# Altium PCB Simple ballast for fluorescent lamps T8.PcbDoc
Units mm, origin at the board's own origin, x right, y up, seen from the top; angles counter-clockwise.
Board outline 116.1 x 42.1 mm, 2 copper layers (Top Layer, Top, Bottom Layer, Bottom), stack 1.571 mm thick; 44 components, 31 nets, 115 pads, 0 vias.
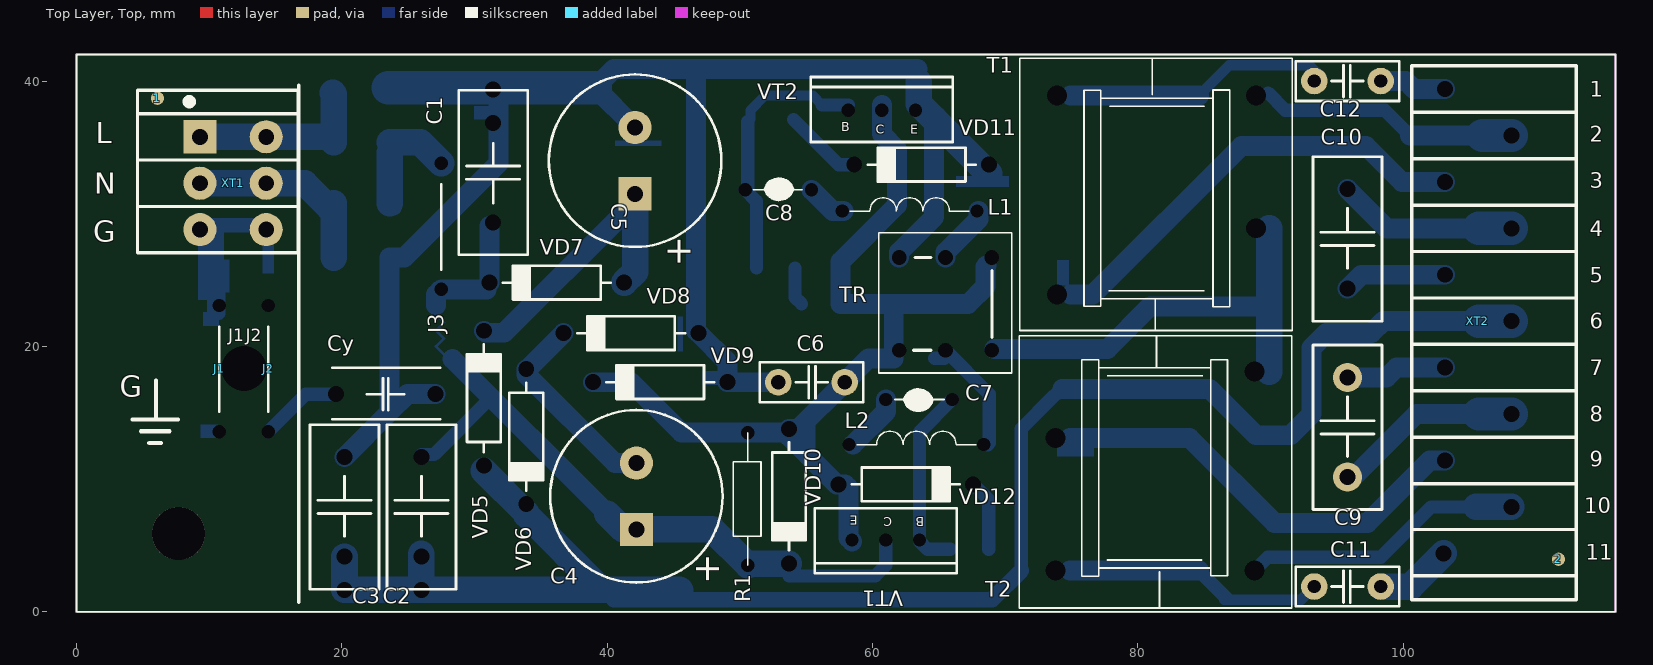
[diagram p0: Top Layer, Top view]
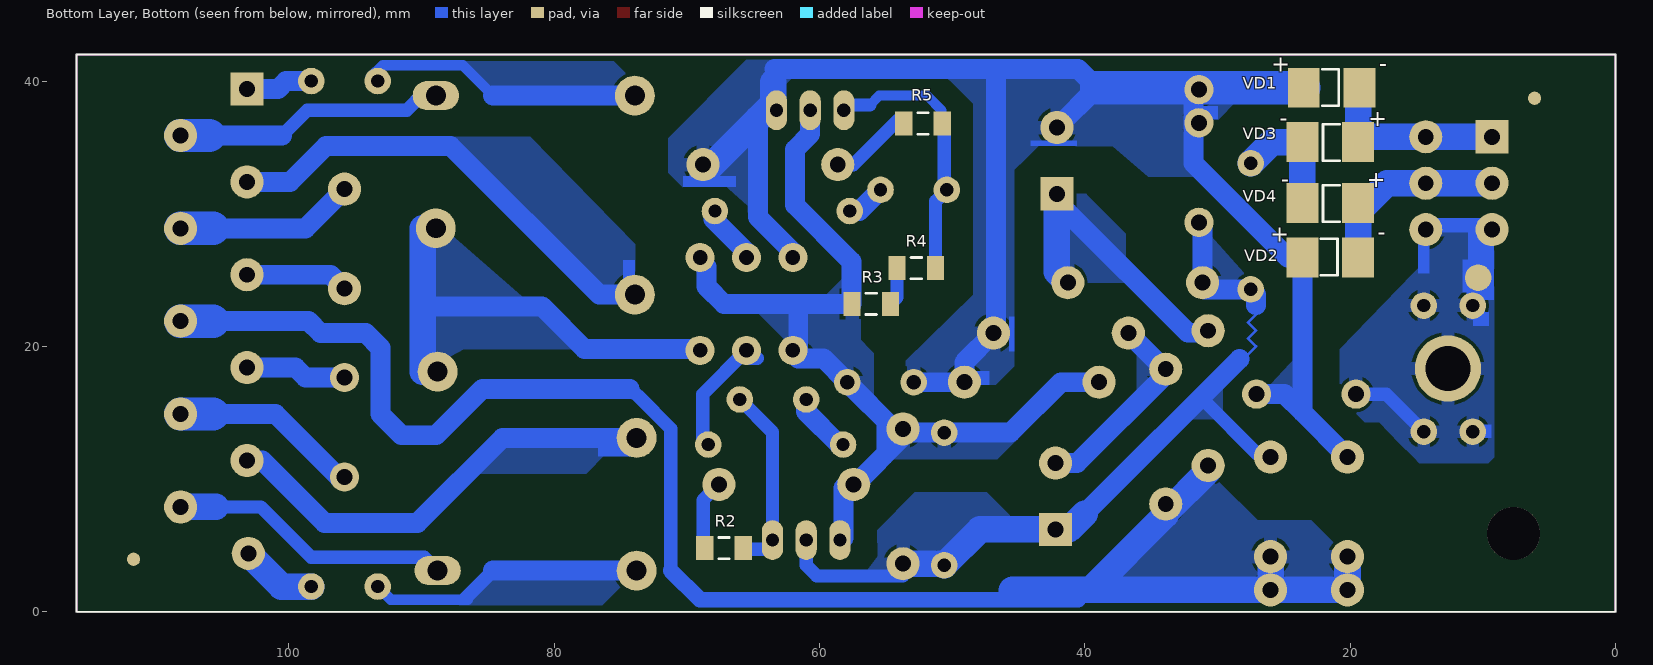
[diagram p1: Bottom Layer, Bottom view, seen from below]
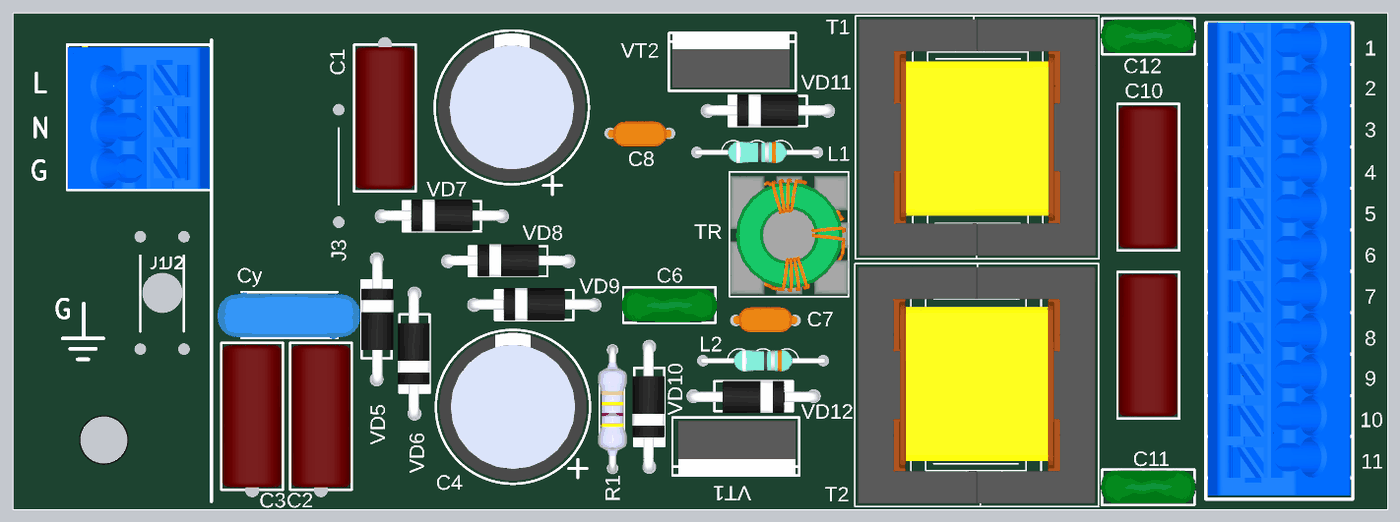
[diagram p2: 3D render of the assembled board from above, using the file's embedded part models]
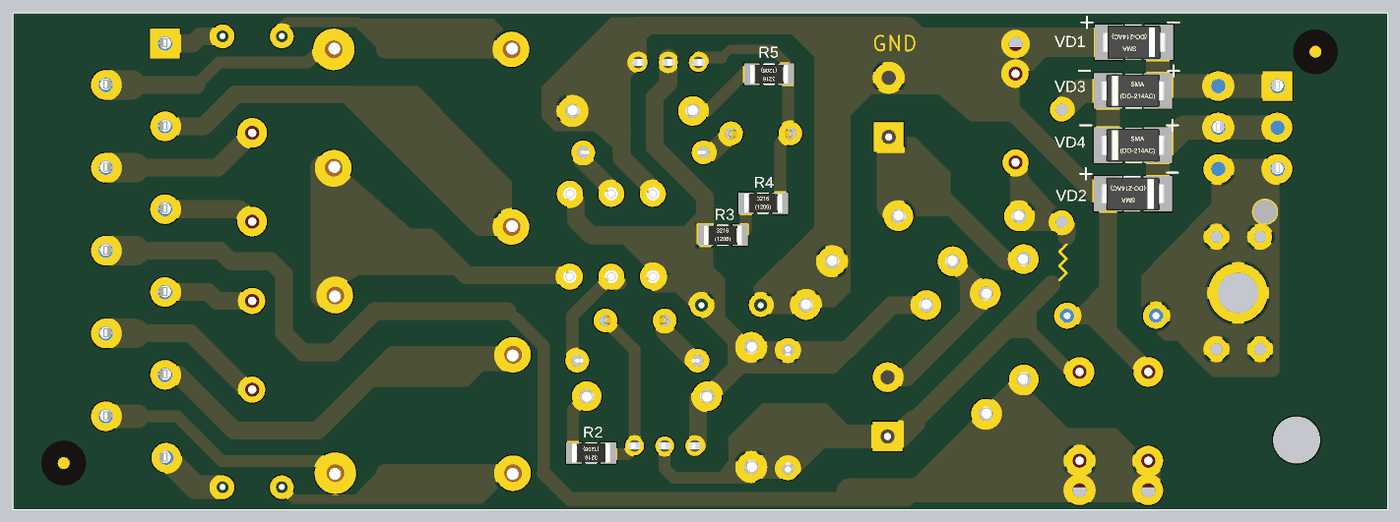
[diagram p3: 3D render of the assembled board from below, using the file's embedded part models]

## Layer stack, top to bottom
Top Layer, Top: signal copper 0.0356
Dielectric: core 1.5, FR-4, Dk 4.8
Bottom Layer, Bottom: signal copper 0.0356

## Board outline
-0.05,0 0,-0.05 116,-0.05 116.05,0 116.05,42 116,42.05 0,42.05 -0.05,42

## Design rules (kind name [scope] priority, off if disabled: settings)
Clearance [OnLayer('Bottom Layer, Bottom') vs OnLayer('Keep-Out Layer, Board')] p1: gap=0.1
ComponentClearance [All] p1: gap=0.1 collisioncheckmode=3 verticalgap=0.1 showdistances=FALSE
Height [All] p1: minheight=0 maxheight=28.4 prefheight=12.7
PlaneClearance [All] p1: clearance=0.254
PolygonConnect [All] p1: connectstyle=Relief reliefconductorwidth=1 reliefentries=4 polygonreliefangle="90 Angle" airgapwidth=0.254
RoutingVias [All] p1: holewidth=0.711 width=1.27 viastyle="Through Hole" minholewidth=0.711 minwidth=1.27 maxholewidth=0.711 maxwidth=1.27
SilkscreenOverComponentPads SilkToSolderMaskClearance [IsPad] p1: minsilkscreentomaskgap=0.254
SolderMaskExpansion [All] p1: expansion=0.102
Width [All] p1: maxlimit=2.5 minlimit=0.1 preferedwidth=0.254
24 further rules are at their usual default settings.

## Components (designator, comment, footprint, x,y, rotation, side; value= is the part's Value field where it differs from the comment)
1 "" REPER 6.1,38.7 r0 top
2 "" REPER 111.7,3.95 r0 top
C1 "Comment" CAPR5.0X13.0-7.5/10#1 31.4,33.1 r90 top
C2 "Comment" CAPR5.0X13.0-7.5/10#2 26,7.9 r270 top
C3 "Comment" CAPR5.0X13.0-7.5/10#2 20.2,7.9 r270 top
C4 "33mkF" "CAPR E 12.5x20, pitch 5mm" 42.2,8.7 r90 top
C5 "33mkF" "CAPR E 12.5x20, pitch 5mm" 42.1,34 r90 top
C6 "Comment" CAPR5.0x13.0-5.0#1 55.4,17.3 r0 top
C7 "Comment" "CAPR5.0x2.5-5.0 P. Disk" 63.5,16 r180 top
C8 "Comment" "CAPR5.0x2.5-5.0 P. Disk" 52.9,31.8 r0 top
C9 "Comment" CAPR5.0x13.0-7.5#1 95.8,13.9 r270 top
C10 "Comment" CAPR5.0x13.0-7.5#2 95.8,28.1 r270 top
C11 "Comment" CAPR5.0x13.0-5.0#2 95.8,1.9 r180 top
C12 "Comment" CAPR5.0x13.0-5.0#2 95.8,40 r180 top
Cy "Comment" "CAPR Y - 7.5" 23.3,16.4 r0 top
J1 "Comment" "AXIAL- Jumper_9.5mm" 10.762,13.574 r90 top net-tie
J2 "Comment" "AXIAL- Jumper_9.5mm" 14.445,13.574 r90 top net-tie
J3 "Comment" "AXIAL- Jumper_9.5mm" 27.5,24.3 r90 top net-tie
L1 "Comment" "AXIAL Inductor - 0.4" 62.8,30.2 r0 top
L2 "Comment" "AXIAL Inductor - 0.4" 63.3,12.6 r0 top
R1 "Comment" RES10.0-1/4W-470k 50.6,8.5 r270 top
R2 "Comment" RESC3216(1206)N 67.2,4.8 r0 bottom
R3 "Comment" RESC3216(1206)N 56.1,23.2 r180 bottom
R4 "Comment" RESC3216(1206)N 52.7,25.9 r180 bottom
R5 "Comment" RESC3216(1206)N 52.2,36.8 r0 bottom
T1 "TKM-E20-1mH-1gH" TKM-E20-1mH-1gH#1 81.2,31.2 r0 top
T2 "TKM-E20-1mH-1gH" TKM-E20-1mH-1gH#2 81.5,10.8 r180 top
TR "Comment" TKM-TR9-16uH 65.5,23.3 r180 top
VD1 "" "CD4532-1812 (mod)" 21.4,39.5 r180 bottom
VD2 "" "CD4532-1812 (mod)" 21.5,26.7 r180 bottom
VD3 "Diode HS1x" "CD4532-1812 (mod)" 21.5,35.4 r0 bottom
VD4 "" "CD4532-1812 (mod)" 21.5,30.8 r0 bottom
VD5 "" DIODE-0.4 30.7,16.1 r90 top
VD6 "" DIODE-0.4 33.9,13.2 r270 top
VD7 "" DIODE-0.4 36.2,24.8 r180 top
VD8 "" DIODE-0.4 41.8,21 r180 top
VD9 "" DIODE-0.4 44,17.3 r180 top
VD10 "" DIODE-0.4 53.7,8.7 r270 top
VD11 "Comment" "DIODE-0.4 - TKM_SILK" 63.7,33.7 r180 top
VD12 "Comment" "DIODE-0.4 - TKM_SILK" 62.5,9.6 r0 top
VT1 "" TO-220-AB 61,5.4 r180 top
VT2 "" TO-220-AB 60.7,37.8 r0 top
XT1 "Connect x3" ZIP-Ballast3 6.699,37.798 r90 top
XT2 "Comment" ZIP-Ballast11 105.15,21.9 r270 top locked

## Footprints (in the part's own frame and the unit in brackets; to place one, negate y for a bottom-side part, rotate by r counter-clockwise, add the part's x,y. Pads: shape width x height; smd on the part's side, far side on the other; paste and mask are expansions set on the pad)
"AXIAL Inductor - 0.4" [mm] "Axial Device, Thru-Hole; 2 Leads; Pitch 400 mil; Induc 18uH"
  round 0 / inner round 0 / far side round 2 hole 1 unplated: 1(-5.08,0) 2(5.08,0)
  silkscreen extent -4.5,0 4.5,1, body extent -5.28,-0.92 5.28,0.92, height 1.92
"AXIAL- Jumper_9.5mm" [mm] "Axial Device, Thru-Hole; 2 Leads; Long Pin_9.5mm"
  round 0 / inner round 0 / far side round 2 hole 1 unplated: 1(0,0) 1(9.5,0)
  silkscreen extent 1.5,0 7.9,0, body extent -0.25,-0.25 9.75,0.25, height 0.75
"CAPR5.0x2.5-5.0 P. Disk" [mm] "Capacitor Ceramic Disk,Thru-Hole Body 5.0 x 2.5 mm (WxT) Pin Spacing 5.0 mm."
  round 0 / inner round 0 / far side round 2 hole 1 unplated: 1(-2.5,0) 2(2.5,0)
  silkscreen extent -1.9,-0.84 1.8,0.93, body extent -2.68,-1.1 2.68,1, height 4.8
CAPR5.0x13.0-5.0#1 [mm] "Capacitor class X 2,Thru-Hole Body 5.0 x 13.0 mm (WxT) Pin Spacing 5.0 mm (typ)"
  round 2 hole 1.1: 1(-2.5,0) 2(2.5,0)
  silkscreen extent -3.9,-1.5 3.9,1.5, body extent -4,-1.45 4,1.4, height 4.31
CAPR5.0x13.0-5.0#2 [mm] "Capacitor class X 2,Thru-Hole Body 5.0 x 13.0 mm (WxT) Pin Spacing 5.0 mm (typ)"
  round 2 hole 1: 1(-2.5,0) 2(2.5,0)
  silkscreen extent -3.9,-1.5 3.9,1.5, body extent -4,-1.45 4,1.4, height 4.31
CAPR5.0x13.0-7.5#1 [mm] "Capacitor class X 2,Thru-Hole Body 18.0 x 9.0 mm (WxT) Pin Spacing 7.5mm (typ)"
  round 2.2 hole 1.2: 1(-3.75,0) 2(3.75,0)
  silkscreen extent -6.2,-2.6 6.2,2.6, body extent -6,-2.5 6,2.5, height 10
CAPR5.0x13.0-7.5#2 [mm] "Capacitor class X 2,Thru-Hole Body 18.0 x 9.0 mm (WxT) Pin Spacing 7.5mm (typ)"
  round 0 / inner round 0 / far side round 2.5 hole 1.2 unplated: 1(-3.75,0) 2(3.75,0)
  silkscreen extent -6.2,-2.6 6.2,2.6, body extent -6,-2.5 6,2.5, height 10
CAPR5.0X13.0-7.5/10#1 [mm] "Capacitor Film,Thru-Hole Body 5.0 x 12.0mm (WxT) Pin Spacing 7.5 or 10.0mm"
  round 0 / inner round 0 / far side round 2.2 hole 1.2 unplated: 1(-3.75,0) 2(3.75,0) 2(6.25,0)
  silkscreen extent -6.2,-2.6 6.2,2.6, body extent -6,-2.5 6,2.5, height 10
CAPR5.0X13.0-7.5/10#2 [mm] "Capacitor Film,Thru-Hole Body 5.0 x 12.0mm (WxT) Pin Spacing 7.5 or 10.0mm"
  round 0 / inner round 0 / far side round 2.5 hole 1.2 unplated: 1(-3.75,0) 2(3.75,0) 2(6.25,0)
  silkscreen extent -6.2,-2.6 6.2,2.6, body extent -6,-2.5 6,2.5, height 10
"CAPR E 12.5x20, pitch 5mm" [mm] "CCapacitor Electrolytic Radial; 2 Leads 12.5 x20 mm(DxH), pitch 5mm"
  rect 2.5x2.5 hole 1.2: 1(-2.5,0)
  round 2.5 hole 1.2: 2(2.5,0)
  silkscreen extent -6.5,-6.5 6.5,6.5, body extent -6.23,-6.25 6.25,6.25, height 20
"CAPR Y - 7.5" [mm] "Capacitor class Y 2,Thru-Hole Body 4.0 x 13.0 mm (WxT) Pin Spacing  7.5  mm (typ)"
  round 0 / inner round 0 / far side round 2.2 hole 1.2 unplated: 1(-3.75,0) 2(3.75,0)
  silkscreen extent -4,-1.9 4.1,2, body extent -6,-1.99 6,1.99, height 14.96
"CD4532-1812 (mod)" [mm] "Chip Diode; Body 4.5 x 3.2 mm (LxW typ)"
  rect 2.4x3 smd: 1(-2.1,0) 2(2.1,0)
  silkscreen extent -0.7,-1.35 0.55,1.4, body extent -2.75,-1.4 2.75,1.4, height 2.6
DIODE-0.4 [mm] "Diode, Thru-Hole; 2 Leads; 0.4 in Pin Spacing"
  round 0 / inner round 0 / far side round 2.5 hole 1.2 unplated: 1(-5.08,0) 2(5.08,0)
  silkscreen extent -4.06,-1.27 4.06,1.27, body extent -5.51,-1.42 5.51,1.3, height 2.72
"DIODE-0.4 - TKM_SILK" [mm] "Diode, Thru-Hole; 2 Leads; 0.4 in Pin Spacing"
  round 0 / inner round 0 / far side round 2.5 hole 1.2 unplated: 1(-5.08,0) 2(5.08,0)
  silkscreen extent -4.06,-1.27 4.06,1.27, body extent -5.51,-1.42 5.51,1.3, height 2.72
REPER [mm]
  round 1 all layers, no hole: 1(0,0)
RES10.0-1/4W-470k [mm] "Resistor, Axial; Pitch 10.0mm, Lead Dia. 0.7 mm (max)"
  round 0 / inner round 0 / far side round 2 hole 1 unplated: 1(-5,0) 2(5,0)
  silkscreen extent -5,-1.1 5,1, body extent -5.38,-1.2 5.38,1.2, height 2.41
RESC3216(1206)N [mm] "Chip Resistor, Body 3.2x1.6mm, IPC Medium Density"
  rect 1.3x1.8 smd: 1(-1.45,0) 2(1.45,0)
  silkscreen extent -0.4,-0.8 0.4,0.8, body extent -1.6,-0.8 1.6,0.8, height 0.55
TKM-E20-1mH-1gH#1 [mm] "E20/10/6 Choke (H)"
  round 0 / inner round 0 / far side round 3 hole 1.5 unplated: 1(-7.285,7.701) 4(-7.285,-7.299) 6(7.715,-2.299)
  round 0 / inner round 0 / far side oval 3.5x2.2 hole 1.5 unplated: 8(7.715,7.701)
  silkscreen extent -10.1,-10 10.44,10.52, body extent -9.83,-9.74 10.17,10.26, height 16.5
TKM-E20-1mH-1gH#2 [mm] "E20/10/6 Choke (H)"
  round 0 / inner round 0 / far side oval 3.5x2.2 hole 1.5 unplated: 1(-7.285,7.701)
  round 0 / inner round 0 / far side round 3 hole 1.5 unplated: 4(-7.285,-7.299) 6(7.715,-2.299) 8(7.715,7.701)
  silkscreen extent -10.1,-10 10.44,10.52, body extent -9.83,-9.74 10.17,10.26, height 16.5
TKM-TR9-16uH [mm] "Toroid Choke Ballast"
  round 0 / inner round 0 / far side round 2.2 hole 1.1 unplated: 1(3.5,3.6) 2(0,3.6) 3(-3.5,3.6) 4(-3.5,-3.4) 5(0,-3.4) 6(3.5,-3.4)
  silkscreen extent -5,-5.26 5.03,5.3, body extent -5,-4.9 5,5.1, height 7.8
TO-220-AB [mm] "TO, Thru-Hole, Vertical, Heatsink Mounted; 3 In-Line Leads; Pitch 2.54 mm"
  rect 0x0 / inner rect 0x0 / far side oval 1.6x3 hole 1 unplated: 1(-2.54,0)
  round 0 / inner round 0 / far side oval 1.6x3 hole 1 unplated: 2(0,0) 3(2.54,0)
  silkscreen extent -5.35,-2.4 5.35,2.5, body extent -5.05,-2.1 4.85,2.4, height 22.8
ZIP-Ballast3 [mm] "In-Line; 3 Zig-Zag Leads; Body 12x 12mm; Pitch 3.5 mm"
  round 2.5 hole 1.2 unplated: 1(-2,-7.6) 2(-5.5,-2.6) 2(-5.5,-7.6) 3(-9,-7.6)
  rect 2.5x2.5 hole 1.2 unplated: 1(-2,-2.6)
  round 2.5 hole 1.2: 3(-9,-2.6)
  silkscreen extent -10.75,-10 1.5,2.1, body extent -10.7,-9.9 1.3,2.1, height 1.5
ZIP-Ballast11 [mm] "In-Line; 11 Zig-Zag Leads; Body 33x 12mm; Pitch 3.5 mm"
  rect 0x0 / inner rect 0x0 / far side rect 2.5x2.5 hole 1.2 unplated: 1(-17.5,-2)
  round 0 / inner round 0 / far side round 2.5 hole 1.2 unplated: 2(-14,3) 3(-10.5,-2) 4(-7,3) 5(-3.5,-2) 6(0,3) 7(3.5,-2) 8(7,3) 9(10.5,-2) 10(14,3) 11(17.5,-2.1)
  silkscreen extent -19.25,-4.5 21,7.9, body extent -19.3,-4.3 20.7,7.7, height 13.1

## Part data
C1 C2 C3 C6 C9 C10 C11 C12 Cy: library part Cap1, "Capacitor GOST"
C4 C5: library part "Cap Pol", "Cap Pol GOST"
C7 C8: library part Cap_SMD, "Ceramic"
J1 J2 J3: library part Jumper_1, "Jumper Wire"
L1 L2: library part "Choke Axial", "Axial 1/4W"
R1 R2 R3 R4 R5: library part "Res 1/4W", "Resistor GOST"
T1 T2: library part "Choke Ballast-TKM-E20-1mH-1gF", "E20/10/6"
TR: library part "Trans TR-TKM", "Trans TR GOST"
VD1 VD2 VD3 VD4: library part Diode1, "Diode GOST"
VD5 VD6 VD7 VD8 VD9 VD10 VD11 VD12: library part "Diode HS1x", "Diode HS1x (GOST)"
VT1 VT2: library part MJE13007, "NPN_TO-220"
XT1: "Connect x3 GOST"
XT2: library part "Connect x11", "Connect x11 GOST"

## Free pads (board coordinates)
  round 3.988 hole 3.988 unplated: 0(7.689,5.898)
  round 2 smd far side: 0(10.35,25.175)
  round 0 / inner round 0 / far side round 5 hole 3.4 unplated: 2(12.628,18.328)

## Nets (pads, with @x,y where several pads share a name; then routed paths per layer and width w, separated by ;. In a path a pad name is that pad's centre, name@x,y a point inside that pad or via, vN(x,y) a via of type N, cw(c..) or ccw(c..) an arc to the next point about the centre after c; other vN are vias at no path point)
NetC1_1: C1.1 C2.1 C4.1 J3.1 R1.2 VD3.2 VD4.2 VD7.2 VD10.2 VT1.2 | length 73.1
  Bottom Layer, Bottom w0.2: 27.1,23.1 27.1,22.4 27.7,21.8 27.1,21.2 27.7,20.6 27.1,20 28.05,19.05 28.35,19.05
  Bottom Layer, Bottom w1: VD4.2 VD4.2@24,30.4 ; VD3.2@23.6,34.6 VD3.2@24,35 ; C2.1@26,11.85 26.95,11.85 30.95,15.85 ; VD7.2@30.92,24.3 VD7.2@31.27,24.65 ; C1.1@31.12,29.07 C1.1 ; C4.1@42,6.5 C4.1@42.2,6.5 ; VD10.2@53.7,2.7 60.2,2.7 61,3.5 VT1.2@61,5.1
  Bottom Layer, Bottom w1.5: 27.1,23.1 27.1,23.9 27.5,24.3 VD7.2@30.92,24.3 ; 28.35,19.05 40,7.4 ; VD7.2 C1.1@31.12,29.07
  Bottom Layer, Bottom w2: VD4.2 VD3.2@23.6,34.6 ; VD3.2 25.9,35.4 J3.1@27.5,33.8 ; 40,7.4 41.2,6.2 C4.1 47.9,6.2 R1.2 50.72,3.62 VD10.2
NetC1_2: C1.2 C3.1 C5.2 C6.1 Cy.2 TR.6 VD1.1 VD2.1 VD8.1 VD9.1 VD11.1 VT2.3 | length 131.2
  Bottom Layer, Bottom w1: C6.1@53,17.4 C6.1@53.1,17.3
  Bottom Layer, Bottom w1.5: C3.1 23.6,15.05 ; Cy.2 24.95,16.4 23.6,15.05 ; C1.2@31.8,39.35 31.8,36.85 31.8,33.8 24.7,26.7 VD2.1 23.6,15.05 ; C5.2 39.1,39.5 40.5,40.9 46.7,40.9 ; C6.1 VD9.1 49.08,18.8 VD8.1 46.7,21.18 46.7,40.9 ; TR.6 62,27.1 64.64,29.74 64.64,37.14 ; 63.4,40.9 46.7,40.9
  Bottom Layer, Bottom w2: 63.5,39.9 63.5,38.28 64.64,37.14 VD11.1@68.78,33
  Bottom Layer, Bottom w2.5: VD1.1 31.65,39.5 31.8,39.35 31.95,39.5 39.1,39.5
NetC2_2: C2.2 C3.2 VD5.1 VD6.2 XT2.6 | length 134.9
  Bottom Layer, Bottom w1.016: 39.75,1.65 40.5,0.9 ; 71.2,3.1 71.2,13.8 73.6,16.2 74.3,16.8
  Bottom Layer, Bottom w1.2: 40.5,0.9 69,0.9 71.2,3.1
  Bottom Layer, Bottom w1.5: 74.3,16.8 85.4,16.8 88.9,13.3 91.5,13.3 93.1,14.9 93.1,19.9 94.2,21 97.6,21 98.5,21.9 XT2.6
  Bottom Layer, Bottom w2: C3.2@20.2,4.15 20.2,1.65 39.57,1.65 ; C2.2@26,1.85 C2.2@26,4.35 ; VD5.1@30.7,10.62 33.9,7.42 33.9,7.32 39.57,1.65 ; 45.5,1.6 45.45,1.65 39.75,1.65 39.57,1.65
  Bottom Layer, Bottom w2.5: 105.7,21.9 XT2.6
NetC4_2: C4.2 VD6.1 VD8.2 | length 15.4
  Bottom Layer, Bottom w1.5: VD8.2 34,18.28 VD6.1 33.9,17.88 40.58,11.2 C4.2
NetC5_1: C5.1 VD5.2 VD7.1 | length 21.4
  Bottom Layer, Bottom w1.5: VD5.2 30.85,21.03 32.23,21.03 41.28,30.08
  Bottom Layer, Bottom w2: VD7.1 42.1,25.62 C5.1
NetC6_2: C6.2 R1.1 R3.1 TR.1 TR.4 VD9.2 VD10.1 VD12.1 VT1.3 VT2.2 | length 71.9
  Bottom Layer, Bottom w1: VT1.3@58.06,5.5 VT1.3@58.16,5.6
  Bottom Layer, Bottom w1.5: VD9.2 41.8,17.3 45.6,13.5 R1.1 53.42,13.5 VD10.1 ; VT1.3@58.46,5.3 58.2,5.56 58.2,9.32 57.92,9.6 57.3,9.6 53.7,13.2 VD10.1 ; VT2.2@60.7,38.2 60.7,36 61.85,34.85 61.85,30.65 57.6,26.4 57.6,23.2 67.2,23.2 68.5,24.5 68.5,26 TR.4@68.6,26.1 ; 61.6,23.2 61.6,19.1 59.7,19.1 C6.2 54.38,13.78 VD10.1
NetC7_1: C7.1 R2.1 VT1.1 | length 14.3
  Bottom Layer, Bottom w1: R2.1@65.85,4.7 64.14,4.7 63.54,5.3 63.54,13.54 C7.1
NetC7_2: C7.2 L2.1 | length 4.4
  Bottom Layer, Bottom w1.5: L2.1@58.52,12.6 61,15.08 C7.2
NetC8_1: C8.1 R4.2 R5.1 VT2.1 | length 20.5
  Bottom Layer, Bottom w0.75: R5.1@50.6,36.95 50.8,37.15 50.8,37.8 51.9,38.9 55.5,38.9 56.2,38.2
  Bottom Layer, Bottom w1: R5.1@50.6,36.95 50.6,32 C8.1 51.25,30.95 R4.2 ; 56.2,38.2 VT2.1@58.16,38.2
NetC8_2: C8.2 L1.1 | length 3.1
  Bottom Layer, Bottom w1.5: C8.2 57,30.2 L1.1@57.82,30.2
NetC9_1: C9.1 XT2.7 | length 7.7
  Bottom Layer, Bottom w1.5: C9.1 98.75,17.65 99.5,18.4 XT2.7
NetC9_2: C9.2 XT2.8 | length 16.8
  Bottom Layer, Bottom w1.5: C9.2 96.25,10.15 101,14.9 XT2.8
  Bottom Layer, Bottom w2.5: 105.7,14.9 XT2.8
NetC10_1: C10.1 XT2.4 | length 13.6
  Bottom Layer, Bottom w1.5: C10.1 98.75,28.9 105.7,28.9
  Bottom Layer, Bottom w2.5: 105.7,28.9 XT2.4
NetC10_2: C10.2 XT2.5 | length 7.8
  Bottom Layer, Bottom w1.5: C10.2 96.85,25.4 XT2.5
NetC11_1: C11.1 XT2.11 | length 5.8
  Bottom Layer, Bottom w2: C11.1 100.55,1.9 XT2.11
NetC11_2: C11.2 T2.8 | length 19.9
  Bottom Layer, Bottom w0.8: 86.5,0.9 92.3,0.9 C11.2
  Bottom Layer, Bottom w1.016: 84.601,3.099 86.7,1
  Bottom Layer, Bottom w1.5: T2.8@74.885,3.099 84.601,3.099
NetC12_1: C12.1 XT2.1 | length 5.1
  Bottom Layer, Bottom w1.5: C12.1 100.2,40 100.8,39.4 XT2.1
NetC12_2: C12.2 T1.1 | length 20.2
  Bottom Layer, Bottom w0.8: 84.592,38.901 86.891,41.2 92.9,41.2 C12.2@93.8,40.3
  Bottom Layer, Bottom w1.5: T1.1@74.915,38.901 84.592,38.901
NetCy_1: Cy.1 J1.1 J2.1 pad.0@10.35,25.175 pad.2 XT1.3 | length 12.7
  Bottom Layer, Bottom w0.508: pad.0@10.059,24.763 10.122,24.7 10.706,24.116 10.35,24.116
  Bottom Layer, Bottom w1: J2.1@14.445,13.574 17.271,16.4 Cy.1
  Bottom Layer, Bottom w1.016: 10.35,24.116 10.35,22.599 J1.1@10.723,22.599 ; J1.1@10.723,22.599 10.706,24.116 10.722,22.599 10.723,22.499 J1.1@10.723,22.599
NetL1_2: L1.2 TR.5 | length 4.5
  Bottom Layer, Bottom w1.5: TR.5 65.5,27.1 67.98,29.58 L1.2@67.98,30.2
NetL2_2: L2.2 TR.2 | length 9.2
  Bottom Layer, Bottom w1.016: TR.2@64.7,19.1 TR.2@65.4,19.1 ; TR.2 68.8,16.4 68.8,12.72 L2.2@68.68,12.6
NetR2_2: R2.2 VD12.2 | length 5.4
  Bottom Layer, Bottom w1: VD12.2 68.75,8.43 R2.2@68.75,4.7
NetR3_2: R3.2 R4.1 | length 2.9
  Bottom Layer, Bottom w1: R4.1 54.15,23.7 R3.2
NetR5_2: R5.2 VD11.2 | length 6
  Bottom Layer, Bottom w1: R5.2@54.05,37.1 57.45,33.7 VD11.2
NetT1_4: T1.4 XT2.3 | length 34
  Bottom Layer, Bottom w1.5: T1.4@74.915,23.901 76.601,23.901 87.8,35.1 97.2,35.1 99.9,32.4 XT2.3
NetT1_6: T1.6 T2.4 TR.3 | length 32.8
  Bottom Layer, Bottom w1.5: TR.3@69.2,19.8 77.7,19.8 80.9,23 89.885,23
  Bottom Layer, Bottom w2: T2.4@89.885,18.099 89.885,23 89.885,28.871 T1.6@89.915,28.901
NetT1_8: T1.8 XT2.2 | length 19.7
  Bottom Layer, Bottom w1: T1.8@89.815,39.101 91.116,37.8 98.6,37.8 100.5,35.9
  Bottom Layer, Bottom w1.5: 100.5,35.9 106,35.9
  Bottom Layer, Bottom w2.5: 106,35.9 XT2.2
NetT2_1: T2.1 XT2.10 | length 21.4
  Bottom Layer, Bottom w1: T2.1 89.786,4.1 98.3,4.1 102.1,7.9 105.5,7.9
  Bottom Layer, Bottom w2: 105.5,7.9 XT2.10
NetT2_6: T2.6 XT2.9 | length 32.9
  Bottom Layer, Bottom w1.5: T2.6@74.885,13.099 83.901,13.099 90.3,6.7 97.3,6.7 102,11.4 XT2.9
NetVD1_2: VD1.2 VD3.1 XT1.1 | length 14
  Bottom Layer, Bottom w2: XT1.1@9.299,35.798 14.299,35.798 19.002,35.798 VD3.1 19.4,39 VD1.2@19.3,39.1
NetVD2_2: VD2.2 VD4.1 XT1.2 | length 14.6
  Bottom Layer, Bottom w2: XT1.2@9.299,32.298 14.299,32.298 17.202,32.298 VD4.1@19.05,30.45 ; VD2.2 VD4.1
pads on no net: 1.1 2.1

## Polygon pours and split planes (outlines as drawn)
NetT1_4 on Bottom Layer, Bottom "Bottom Layer, Bottom-No Net" (solid, pour order 33): 73.915,23.901 73.9,25.1 73.9,27.7 81.8,35.8 88.4,35.8 88.4,35.4 76.901,23.901
NetC6_2 on Bottom Layer, Bottom "Bottom Layer, Bottom-No Net" (solid, pour order 34): 44.8,13.3 46.4,11.7 46.6,11.5 54.9,11.5 54.9,12.9 54.3,13.5 54.2,13.6 44.5,13.6
NetT2_6 on Bottom Layer, Bottom "Bottom Layer, Bottom-No Net" (solid, pour order 32): 86.3,10.4 77.584,10.4 74.885,13.099 83.901,13.099
NetCy_1 on Bottom Layer, Bottom "Bottom Layer, Bottom-GROUND" (solid, pour order 27): 9.15,27.45 9.15,11.625 9.575,11.2 14.775,11.2 15.2,11.625 16.3,12.7 17.8,14.3 18.9,14.3 20.8,16.2 20.8,19.8 15.25,25.5 14.65,26.1 14.65,28 14.675,29.375 8.625,29.375 8.6,28.3 8.6,28
NetC6_2 on Bottom Layer, Bottom "Bottom Layer, Bottom-No Net" (solid, pour order 31): 56.9,22.8 56.9,20.6 56.9,20.5 56.2,19.8 55.9,19.5 55.9,15.6 56.6,15.6 60.1,19.1 61.6,19.1 61.6,19.5 64.9,22.8 64.3,23.4 59.8,23.4 59.8,23.6 58.1,25.3 56.9,25.3
NetC5_1 on Bottom Layer, Bottom "Bottom Layer, Bottom-No Net" (solid, pour order 30): 36.9,26.3 36.9,28.5 39.8,31.4 39.9,31.5 42.1,31.5 42.1,25.62 41.28,24.8 36.2,24.8
NetC4_2 on Bottom Layer, Bottom "Bottom Layer, Bottom-No Net" (solid, pour order 29): 36.1,19.7 36.1,15.8 36.1,16.08 33.9,18.28
NetC1_1 on Bottom Layer, Bottom "Bottom Layer, Bottom-No Net" (solid, pour order 28): 27.5,24.3 27.5,25 31.4,29.35 31.4,24.3
NetC1_2 on Bottom Layer, Bottom "Bottom Layer, Bottom-No Net" (solid, pour order 25): 49.9,40.7 50.5,40.3 49.9,39.8 48.4,38.3 48.4,23.9 53.5,18.9 53.5,17.1 46.7,17.1 45.3,18.5 45.3,33.3 44.5,34.1 42.1,36.5 40.7,35.1 37.9,35.1 35.2,32.8 31.5,32.8 31.5,35.5 27.2,39.9 27.2,40 38.6,40 40.8,40.7
NetC1_1 on Bottom Layer, Bottom "Bottom Layer, Bottom-No Net" (solid, pour order 26): 45.6,7.2 47.4,9 52.8,9 55.648,6.152 55.6,4.2 56.5,3 49.9,3
NetC1_2 on Bottom Layer, Bottom "Bottom Layer, Bottom-No Net" (solid, pour order 24): 24,19.3 26.4,16.7 26.4,16 24,16
NetC1_1 on Bottom Layer, Bottom "Bottom Layer, Bottom-No Net" (solid, pour order 23): 29.6,14.5 29.6,17.5 32.6,14.5
NetC2_2 on Bottom Layer, Bottom "Bottom Layer, Bottom-No Net" (solid, pour order 22): 20.2,1.65 20.2,4.15 22.95,6.9 26,6.9 26.98,6.9 30.7,10.62 30.7,10.2 39.2,1.7
NetC1_2 on Bottom Layer, Bottom "Bottom Layer, Bottom-No Net" (solid, pour order 18): 65.4,30.1 64.4,30.1 64.4,37.9 61.9,40.4 61.9,41.6 65.5,41.6 71.4,35.7 71.4,33.1 70.3,32 67.5,32.5 65.4,30.6
NetT1_6 on Bottom Layer, Bottom "Bottom Layer, Bottom-No Net" (solid, pour order 20): 77.9,19.8 89.9,30.3 89.885,28.871 89.885,18.099 86.8,19.8
NetC12_2 on Bottom Layer, Bottom "Bottom Layer, Bottom-No Net" (solid, pour order 21): 87,41.5 75.5,41.5 73.5,39.5 73.515,39.485 73.515,38.901 84.592,38.901 84.891,39.2
NetC11_2 on Bottom Layer, Bottom "Bottom Layer, Bottom-No Net" (solid, pour order 19): 84.177,3.1 85.101,3.099 87.3,0.5 76.376,0.501 73.777,3.1

## Keep-outs
Keep-Out Layer, Board:
  lines w0.1: 0,0 116,0 116,42 0,42 0,0

## Other copper
Bottom Layer, Bottom:
  rectangle net NetC6_2: 54.6,11.2 55.7,14.3
  rectangle net NetC1_2: 40.6,35.1 44.1,35.5
  rectangle net NetC1_2: 29.95,37.086 31.05,38.1
  rectangle net NetC1_2: 45.3,19.6 45.7,22.257
  rectangle net NetC1_2: 47.2,17.1 48.7,18.14
  rectangle net NetC1_2: 66.3,32 70.3,32.86
  rectangle net NetVD1_2: 9.799,35.3 14.299,36.5
  rectangle net NetCy_1: 14.025,25.5 14.875,28.9
  rectangle net NetCy_1: 9.05,28.575 14.65,29.675
  rectangle net NetCy_1: 10.875,24.05 11.55,26.55
  region net NetCy_1: 10.75,22.575 9.525,22.575 9.525,21.55 10.75,21.55
  rectangle net NetCy_1: 9.15,23.5 11.1,28.975
  rectangle net NetCy_1: 9.35,13.1 10.65,14.1
  rectangle net NetT1_4: 73.9,24.6 74.8,26.5
  rectangle net NetT2_6: 73.9,11.7 76.7,12.9

## Silkscreen, mask and mechanical layers (free items; w line width, h text height)
Top Overlay, Top Silk:
  rectangle: 38.498,19.73 39.798,22.23
  rectangle: 40.698,16.03 41.998,18.53
  region: 54.97,5.398 54.97,6.698 52.47,6.698 52.47,5.398
  region: 35.17,9.898 35.17,11.198 32.67,11.198 32.67,9.898
  region: 31.97,18.132 31.97,19.432 29.47,19.432 29.47,18.132
  region: 34.168,26.07 32.868,26.07 32.868,23.57 34.168,23.57
  lines w0.1: 0,0 116,0 116,42 0,42 0,0
  lines w0.254: 16.763,0.699 16.763,39.699
  lines w0.305: 4.212,14.491 7.641,14.491 ; 4.847,13.602 7.006,13.602 ; 5.482,12.713 6.371,12.713 ; 5.99,14.491 5.99,17.412
  text "1" at 114.05,38.4 h2
  text "L" at 1.45,35.3 h1.59
  text "2" at 114.05,35 h2
  text "N" at 1.35,31.5 h1.59
  text "3" at 114.05,31.5 h2
  text "G" at 1.25,27.9 h1.59
  text "4" at 114.05,27.9 h2
  text "5" at 114.05,24.4 h2
  text "6" at 114.05,20.9 h2
  text "J1" at 11.45,20.4 h0.94
  text "J2" at 12.75,20.4 h0.94
  text "7" at 114.05,17.4 h2
  text "G" at 3.263,16.199 h1.59
  text "8" at 114.05,13.9 h2
  text "9" at 114.05,10.5 h2
  text "10" at 113.65,7 h2
  text "11" at 113.75,3.5 h2
Bottom Overlay, Bot Silk:
  lines w0.1: 0,0 116,0 116,42 0,42 0,0
  text "-" at 17.2,40.7 h1.25
  text "+" at 24.5,40.7 h1.25
  text "+" at 17.2,36.6 h1.25
  text "-" at 24.7,36.6 h1.25
  text "+" at 17.3,32 h1.25
  text "-" at 24.6,32 h1.25
  text "-" at 17.3,28 h1.25
  text "+" at 24.6,27.9 h1.25
Bottom Solder, Bot Mask:
  lines w0.2: 27.1,22.4 27.7,21.8 ; 27.7,19.4 27.1,20 27.7,20.6 ; 27.7,20.6 27.1,21.2 27.7,21.8 ; 27.7,20.6 27.7,20.6 ; 27.7,21.8 27.7,21.8
  text "GND" at 43.6,38.8 h1.25
Board:
  lines w0.1: 0,0 0,42 116,42 116,0 0,0
Mechanical 7:
  circle w0.1: c27.5,24.3 r0.5
  circle w0.1: c27.5,33.8 r0.5
  circle w0.1: c31.399,39.348 r0.6
  circle w0.1: c31.399,36.848 r0.6
  circle w0.1: c31.399,29.348 r0.6
  circle w0.1: c31.119,24.798 r0.6
  circle w0.1: c41.279,24.798 r0.6
  circle w0.1: c42.099,36.498 r0.6
  circle w0.1: c42.099,31.498 r0.6
  circle w0.1: c98.299,1.898 r0.6
  circle w0.1: c93.299,1.898 r0.6
  circle w0.1: c50.6,13.5 r0.5
  circle w0.1: c50.6,3.5 r0.5
  circle w0.1: c88.784,18.097 r0.75
  circle w0.1: c88.784,3.097 r0.75
  circle w0.1: c73.784,3.097 r0.75
  circle w0.1: c73.784,13.097 r0.75
  circle w0.1: c73.914,23.899 r0.75
  circle w0.1: c88.914,28.899 r0.75
  circle w0.1: c88.914,38.899 r0.75
  circle w0.1: c73.914,38.899 r0.75
  circle w0.1: c63.539,5.398 r0.5
  circle w0.1: c60.999,5.398 r0.5
  circle w0.1: c58.459,5.398 r0.5
  circle w0.1: c50.399,31.798 r0.5
  circle w0.1: c55.399,31.798 r0.5
  circle w0.1: c60.999,15.998 r0.5
  circle w0.1: c65.999,15.998 r0.5
  circle w0.1: c68.379,12.598 r0.5
  circle w0.1: c58.219,12.598 r0.5
  circle w0.1: c67.879,30.198 r0.5
  circle w0.1: c57.719,30.198 r0.5
  circle w0.1: c63.239,37.798 r0.5
  circle w0.1: c60.699,37.798 r0.5
  circle w0.1: c58.159,37.798 r0.5
  circle w0.1: c103.049,4.398 r0.6
  circle w0.1: c108.149,7.898 r0.6
  circle w0.1: c103.149,11.398 r0.6
  circle w0.1: c108.149,14.898 r0.6
  circle w0.1: c103.149,18.398 r0.6
  circle w0.1: c108.149,21.898 r0.6
  circle w0.1: c103.149,25.398 r0.6
  circle w0.1: c108.149,28.898 r0.6
  circle w0.1: c103.149,32.398 r0.6
  circle w0.1: c108.149,35.898 r0.6
  circle w0.1: c103.149,39.398 r0.6
  circle w0.1: c95.799,10.148 r0.6
  circle w0.1: c95.799,17.648 r0.6
  circle w0.1: c95.799,24.348 r0.6
  circle w0.1: c95.799,31.848 r0.6
  circle w0.1: c98.299,39.998 r0.6
  circle w0.1: c93.299,39.998 r0.6
  circle w0.1: c58.619,33.698 r0.6
  circle w0.1: c68.779,33.698 r0.6
  circle w0.1: c61.999,26.698 r0.6
  circle w0.1: c65.499,26.698 r0.6
  circle w0.1: c68.999,26.698 r0.6
  circle w0.1: c68.999,19.698 r0.6
  circle w0.1: c65.499,19.698 r0.6
  circle w0.1: c61.999,19.698 r0.6
  circle w0.1: c57.899,17.298 r0.6
  circle w0.1: c52.899,17.298 r0.6
  circle w0.1: c67.579,9.598 r0.6
  circle w0.1: c57.419,9.598 r0.6
  circle w0.1: c53.699,13.778 r0.6
  circle w0.1: c53.699,3.618 r0.6
  circle w0.1: c42.199,6.198 r0.6
  circle w0.1: c42.199,11.198 r0.6
  circle w0.1: c49.079,17.298 r0.6
  circle w0.1: c46.879,20.998 r0.6
  circle w0.1: c38.919,17.298 r0.6
  circle w0.1: c30.699,21.178 r0.6
  circle w0.1: c33.899,18.278 r0.6
  circle w0.1: c33.899,8.118 r0.6
  circle w0.1: c30.699,11.018 r0.6
  circle w0.1: c25.999,1.648 r0.6
  circle w0.1: c25.999,4.148 r0.6
  circle w0.1: c20.199,1.648 r0.6
  circle w0.1: c20.199,4.148 r0.6
  circle w0.1: c25.999,11.648 r0.6
  circle w0.1: c20.199,11.648 r0.6
  circle w0.1: c27.049,16.398 r0.6
  circle w0.1: c19.549,16.398 r0.6
  circle w0.1: c14.444,13.572 r0.6
  circle w0.1: c10.761,13.572 r0.6
  circle w0.1: c14.444,23.072 r0.6
  circle w0.1: c10.761,23.072 r0.6
  circle w0.1: c14.298,28.796 r0.6
  circle w0.1: c9.298,28.796 r0.6
  circle w0.1: c9.298,32.296 r0.6
  circle w0.1: c14.298,32.296 r0.6
  circle w0.1: c14.298,35.796 r0.6
  circle w0.1: c9.298,35.796 r0.6
  circle w0.1: c12.628,18.328 r2
  circle w0.1: c7.689,5.898 r2
  circle w0.1: c36.719,20.998 r0.6

## Dimensions
0,0 to 116,0 on Keep-Out Layer, Board
0,42 to 0,0 on Keep-Out Layer, Board

## Text inside footprints (layer, text, board x,y; h text height)
C4: Top Overlay, Top Silk "+" at 48.45,2.075 h2 r90
C5: Top Overlay, Top Silk "+" at 46.3,26 h2 r90
VT1: Top Overlay, Top Silk "E" at 58.9,7.5 h1.2 r180; Top Overlay, Top Silk "C" at 61.5,7.4 h1.2 r180; Top Overlay, Top Silk "B" at 63.9,7.4 h1.2 r180
VT2: Top Overlay, Top Silk "E" at 62.85,35.75 h1.2; Top Overlay, Top Silk "C" at 60.25,35.75 h1.2; Top Overlay, Top Silk "B" at 57.65,35.95 h1.2